# Allegro board QUADCOPTER1brd3_4.brd
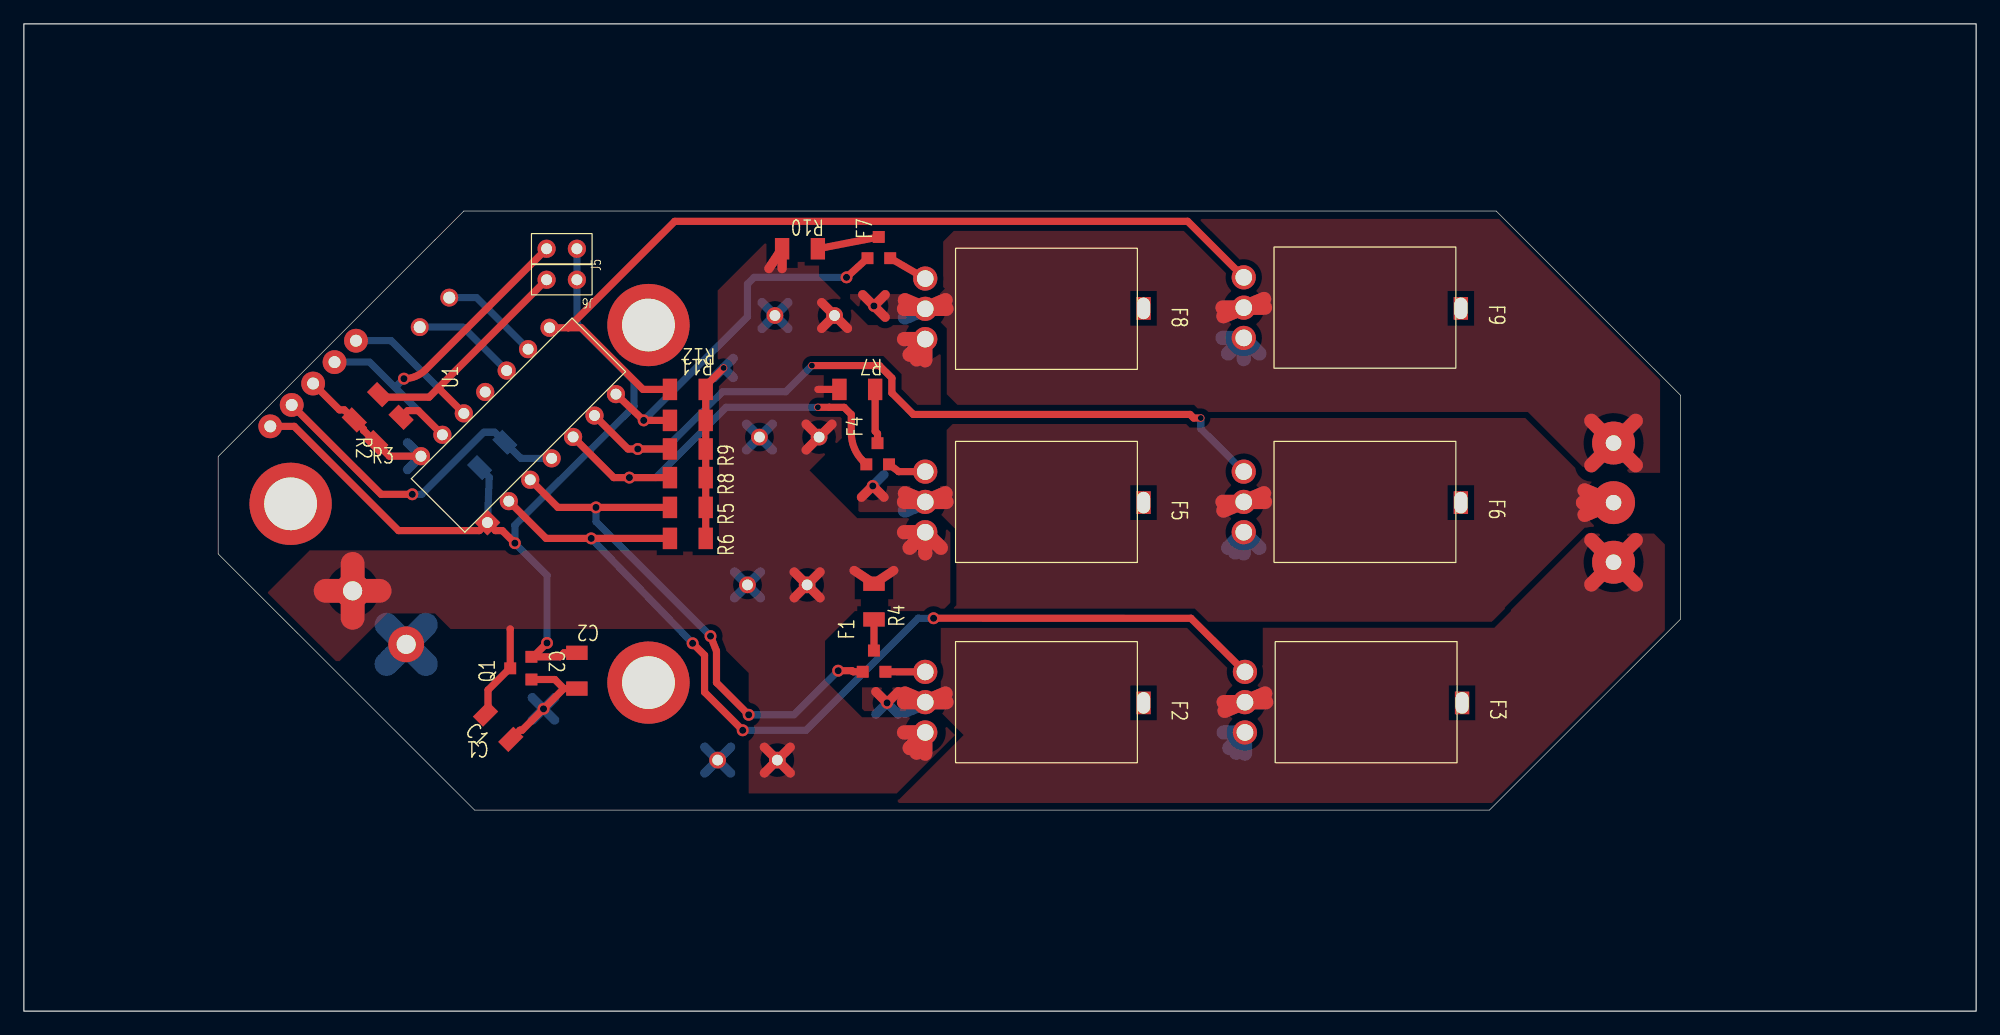
[diagram p0: board, top side]
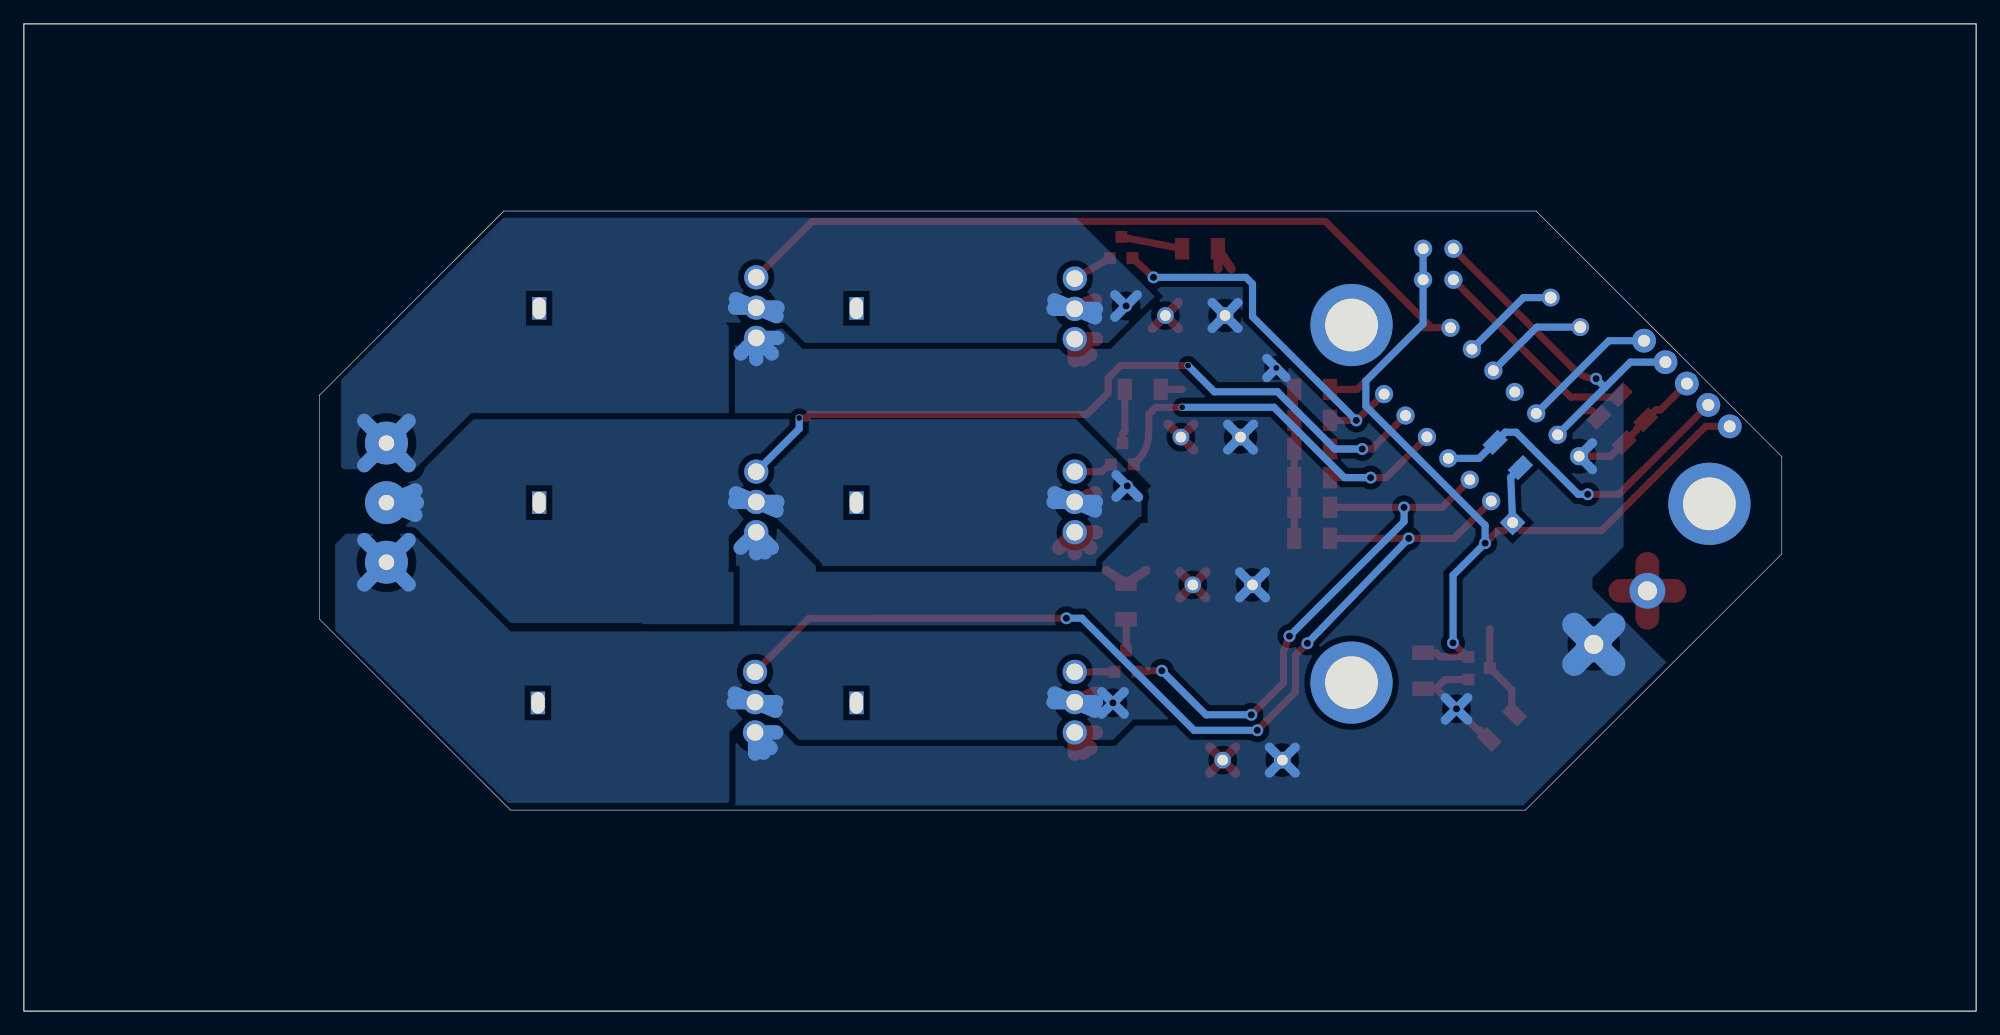
[diagram p1: board, bottom side, seen from below]

Outline 163.65 x 82.83 mm; copper layers: TOP, BOTTOM. Coordinates in mm from the lower left corner of the outline.
Outline path: rectangle 0,0 163.65,82.83 ; 16.29,46.53 16.29,38.36 37.78,16.87 122.86,16.87 138.86,32.88 138.86,51.68 123.42,67.13 36.89,67.13 16.29,46.53

## Placement (name value [footprint] x y rotation side)
C1  1uF  [SMD_CAP_1206]  39.76 23.86 315 top
C2  1uF  [SMD_CAP_1206]  46.36 28.56 270 top
C3  100uF  [CAP250]  66.16 24.06 180 top
C4  100uF  [CAP250]  68.66 38.76 180 top
C5  100uF  [CAP250]  70.96 61.36 180 top
C6  100uF  [CAP250]  69.66 51.16 180 top
F1  2N7002  [SOT23]  71.26 29.36 90 top
F2  IRF9Z34N  [TO220-3A]  75.56 28.46 180 top
F3  IRFZ34N  [TO220-3A]  102.36 28.46 180 top
F4  2N7002  [SOT23]  71.56 46.76 90 top
F5  IRF9Z34N  [TO220-3A]  75.56 45.26 180 top
F6  IRFZ34N  [TO220-3A]  102.26 45.26 180 top
F7  2N7002  [SOT23]  71.66 64.06 90 top
F8  IRF9Z34N  [TO220-3A]  75.56 61.46 180 top
F9  IRFZ34N  [TO220-3A]  102.26 61.56 180 top
J1  CON2  [KDCONN2]  27.56 35.26 315 top
J2  CON2  [KDCONN2_2]  35.66 59.86 225 top
J4  CON5  [CONN5]  18.86 49.06 315 top
J5  JUMPER  [JUMPER2]  46.36 63.96 180 top
J6  JUMPER  [JUMPER2]  46.36 61.36 180 top
J7  CON3  [ED1362]  135.76 35.16 90 top
NOREF  -  [unnamed]  52.36 27.56 0 top
NOREF#2  -  [unnamed#2]  124.56 19.46 180 top
NOREF#3  -  [unnamed]  52.36 57.56 0 top
NOREF#4  -  [unnamed]  22.36 42.56 0 top
NOREF#5  -  [unnamed#2]  97.86 36.26 180 top
NOREF#6  -  [unnamed#2]  97.86 19.46 180 top
NOREF#7  -  [unnamed#2]  97.86 52.56 180 top
NOREF#8  -  [unnamed#2]  124.46 36.26 180 top
NOREF#9  -  [unnamed#2]  124.46 52.56 180 top
Q1  Diodes_AP1117T50L-U  [SOT23]  41.66 28.76 180 top
R1  10k  [SMD_RES_1206]  39.26 46.66 225 bottom
R2  10k  [SMD_RES_1206]  28.76 50.66 45 top
R3  10k  [SMD_RES_1206]  30.56 48.76 45 top
R4  10k  [SMD_RES_1206]  71.26 34.36 90 top
R5  10k  [SMD_RES_1206]  55.66 42.26 180 top
R6  10k  [SMD_RES_1206]  55.66 39.66 180 top
R7  10k  [SMD_RES_1206]  69.86 52.16 180 top
R8  10k  [SMD_RES_1206]  55.66 44.76 180 top
R9  10k  [SMD_RES_1206]  55.66 47.16 180 top
R10  10k  [SMD_RES_1206]  65.06 63.96 180 top
R11  10k  [SMD_RES_1206]  55.66 49.56 180 top
R12  10k  [SMD_RES_1206]  55.66 52.16 180 top
U1  PIC16F1503  [PIC16FL1503]  41.46 49.16 135 top

## Library data of the parts
C1-C6 = CAP
F1 F4 F7 = 2N7002_1
F2 F5 F8 = IRF9Z34N_2
F3 F6 F9 = IRFZ34N
J1 J2 = CON2
J4 = CON5
J5 J6 = JUMPER: User Part Number: ***
J7 = CON3
Q1 = Diodes_AP1117T50L-U_1
R1-R12 = R
U1 = PIC16LF1503_4

## Footprints (pads in the part's own frame, mm; a bottom-side part is the same pattern mirrored in y, then rotated)
CAP250
  round 1.4 hole 0.9: 1(3,3) 2(8,3)
CONN5
  round 2 hole 1: 1(1.27,11.43) 2(1.27,8.89) 3(1.27,6.35) 4(1.27,3.81) 5(1.27,1.27)
ED1362
  round 3.6 hole 1.3: 1(2.5,2.5) 2(7.5,2.5) 3(12.5,2.5)
JUMPER2
  round 1.524 hole 0.914: 1(0,0) 2(2.54,0)
KDCONN2
  round 3 hole 1.6: 1(0,0) 2(6.35,0)
KDCONN2_2
  round 1.5 hole 1: 1(0,0) 2(3.5,0)
PIC16FL1503
  rect 1.524x1.524 hole 0.914: 1(-3.937,7.62)
  round 1.524 hole 0.914: 2(-3.937,5.08) 3(-3.937,2.54) 4(-3.937,0) 5(-3.937,-2.54) 6(-3.937,-5.08) 7(-3.937,-7.62) 8(3.937,-7.62) 9(3.937,-5.08) 10(3.937,-2.54) 11(3.937,0) 12(3.937,2.54) 13(3.937,5.08) 14(3.937,7.62)
SMD_CAP_1206
  rect 1.2x1.8 smd: 1(-1.5,0) 2(1.5,0)
SMD_RES_1206
  rect 1.2x1.8 smd: 1(-1.5,0) 2(1.5,0)
SOT23
  rect 1x1 smd: 1(-0.889,0.94) 2(-0.889,-0.965) 3(0.889,0)
TO220-3A
  round 2.032 hole 1.397: 1(0,0) 2(0,2.54) 3(0,5.08)
unnamed
  round 6.9 hole 4.42: (0,0)
unnamed#2
  rect 1.2x1.9 hole 1.1x1.8: (4,-6.4)

## Nets
12V: C1.1 C3.1 C4.1 C5.1 C6.1 F2.3(S) F5.3(S) F8.3(S) J1.1 Q1.3(VIN) R4.2 R7.2 R10.2
0: C1.2 C2.2 C3.2 C4.2 C5.2 C6.2 F3.3(S) F6.3(S) F9.3(S) J1.2 J4.3 Q1.1(GND) R2.1 R3.1 R5.1 R6.1 R8.1 R9.1 R11.1 R12.1 U1.14(VSS)
A: F2.2(D) F3.2(D) J7.1
ADDR0: J4.2 J5.2 R3.2 U1.13(ICSPDAT/ADDR0)
ADDR1: J4.1 J6.2 R2.2 U1.12(ICSPCLK/ADDR1)
AHIGH: F1.1(GATE) R5.2 U1.3(RA4)
ALOW: F3.1(G) R6.2 U1.2(RA5)
B: F5.2(D) F6.2(D) J7.2
BHIGH: F4.1(GATE) R8.2 U1.5(RC5)
BLOW: F6.1(G) R9.2 U1.6(RC4)
C: F8.2(D) F9.2(D) J7.3
CHIGH: F7.1(GATE) R11.2 U1.7(RC3)
CLOW: F9.1(G) R12.2 U1.8(RC2)
NMCLR: J4.4 R1.1 U1.4(NMCLR)
SCL: J2.2 U1.10(SCL)
SDA: J2.1 U1.9(SDA)
VEXT: C2.1 J4.5 J5.1 J6.1 Q1.2(VOUT) R1.2 U1.1(VDD)
N175255: F4.2(SOURCE) F5.1(G)
N175303: F4.3(DRAIN) R7.1
N175727: F7.2(SOURCE) F8.1(G)
N175775: F7.3(DRAIN) R10.1
N177443: F1.2(SOURCE) F2.1(G)
N1635110: F1.3(DRAIN) R4.1

Pads without a net: U1 11

## Via types
v1: diameter 1, hole 0.6, TOP to BOTTOM, 20 vias
v2: diameter 0.6, hole 0.5, TOP to BOTTOM, 4 vias

## Routing (per net, layer and track width the routed paths; a pad name or vN(x,y) marks a point on that pad's centre or on a via; arc(x,y) is an arc through that point)
12V: length 69.7
  TOP w0.6: C1.1 38.91,25.14 38.91,26.94 40.73,28.76 Q1.3 40.77,32.05 40.76,32.06 ; R7.2 66.56,52.16
  TOP w0.781: 64.58,36.85 C4.1 ; C4.1 66.74,34.68 ; C4.1 64.58,34.68 ; C4.1 66.74,36.85 ; 65.58,47.08 C6.1 ; C6.1 67.74,49.25 ; C6.1 65.58,49.25 ; C3.1 64.24,22.15 ; C3.1 62.08,19.98 ; C3.1 62.08,22.15 ; C3.1 64.24,19.98 ; 66.88,57.28 C5.1 ; C5.1 66.88,59.45 ; C5.1 69.04,57.28 ; 63.56,62.3 R10.2 62.45,62.3 ; 72.92,36.97 R4.2 69.6,36.97
  TOP w1.2: 73.78,56.38 F8.3 ; F8.3 74.84,54.68 ; F8.3 75.56,54.61 ; F8.3 74.25,55.08 ; 74.84,21.68 F2.3 ; F2.3 73.78,23.38 ; F2.3 75.56,21.61 ; F2.3 74.25,22.08 ; 73.78,40.18 F5.3 ; F5.3 75.56,38.41 ; F5.3 74.25,38.88 ; F5.3 76.87,38.88
  TOP w2: 27.56,33 J1.1 ; J1.1 25.3,35.26 ; J1.1 27.56,37.52 ; J1.1 29.82,35.26
0: length 104.4
  TOP w0.6: R6.1 R5.1 R8.1 R9.1 R11.1 R12.1 57.16,52.46 v2(58.66,53.96) ; U1.14 30.64,46.56 R3.1 28.47,48.73 28.47,48.83 R2.1 26.85,50.45 26.45,50.45 J4.3 ; 45.27,27.06 45.26,27.06 v1(43.56,25.36) 41.77,23.57 41.59,23.57 C1.2 ; 45.27,27.06 44.51,27.82 Q1.1 ; 45.27,27.06 C2.2
  BOTTOM w0.781: C6.2 62.74,47.08 ; C6.2 60.58,47.08 ; C6.2 62.74,49.25 ; C6.2 60.58,49.25 ; 42.62,26.3 v1(43.56,25.36) ; v1(43.56,25.36) 44.5,26.3 ; v1(43.56,25.36) 44.5,24.42 ; v1(43.56,25.36) 42.62,24.42 ; C4.2 61.74,34.68 ; C4.2 61.74,36.85 ; C4.2 59.58,36.85 ; C4.2 59.58,34.68 ; v2(58.66,53.96) 59.46,53.16 ; v2(58.66,53.96) 57.86,53.16 ; v2(58.66,53.96) 59.46,54.76 ; C5.2 64.04,57.28 ; C5.2 61.88,59.45 ; C5.2 61.88,57.28 ; C5.2 64.04,59.45 ; 57.08,19.98 C3.2 ; C3.2 59.24,22.15 ; C3.2 57.08,22.15 ; C3.2 59.24,19.98 ; 32.16,45.43 U1.14 32.16,47.69
  BOTTOM w1.2: 100.95,38.88 F6.3 ; F6.3 103.57,38.88 ; F6.3 101.54,38.48 ; F6.3 102.26,38.41 ; 100.49,56.48 F9.3 ; F9.3 102.26,54.71 ; F9.3 103.57,55.18 ; F9.3 100.95,55.18 ; 101.05,22.08 F3.3 ; F3.3 102.36,21.61 ; F3.3 100.59,23.38 ; F3.3 101.64,21.68
  BOTTOM w2: 30.4,32.42 J1.2 ; J1.2 33.7,32.42 ; J1.2 30.4,29.13 ; J1.2 33.7,29.13
A: length 58
  TOP w0.781: 73.3,26.8 v1(72.36,25.86) 71.42,26.8
  TOP w1.2: F3.2 104.06,26.64 ; F3.2 100.59,25.92 ; F3.2 100.66,25.2 ; F3.2 104.13,25.92 ; J7.1 135.12,35.8 ; J7.1 135.12,39.52 ; J7.1 131.4,39.52 ; J7.1 131.4,35.8 ; 73.78,25.92 F2.2 ; F2.2 77.34,25.92 ; F2.2 73.86,26.64 ; F2.2 77.26,26.64
  BOTTOM w0.781: v1(72.36,25.86) 73.3,24.92 ; v1(72.36,25.86) 71.42,26.8 ; v1(72.36,25.86) 73.3,26.8 ; v1(72.36,25.86) 71.42,24.92
  BOTTOM w1.2: 100.66,25.2 F3.2 ; F3.2 104.13,25.92 ; F3.2 104.06,26.64 ; F3.2 100.59,25.92 ; F2.2 77.34,25.92 ; F2.2 73.78,25.92 ; F2.2 77.26,26.64 ; F2.2 73.86,25.2 ; J7.1 135.12,39.52 ; J7.1 131.4,35.8 ; J7.1 135.12,35.8 ; J7.1 131.4,39.52
ADDR0: length 33.5
  TOP w0.6: R3.2 32.18,50.38 33.06,50.38 U1.13 ; J5.2 33.67,53.81 arc(32.84,53.26) v1(31.86,53.06)
  BOTTOM w0.6: J4.2 28.99,54.45 31.12,52.32 ; 31.12,52.32 v1(31.86,53.06) ; 31.12,52.32 U1.13
ADDR1: length 32.8
  TOP w0.6: R2.2 30.03,51.51 33.97,51.51 34.74,52.28 ; 34.74,52.28 J6.2 ; 34.74,52.28 U1.12
  BOTTOM w0.6: U1.12 30.78,56.25 J4.1
AHIGH: length 46.4
  TOP w0.6: F1.1 69.52,28.47 69.43,28.56 v1(68.26,28.56) ; U1.3 44.77,42.26 v1(47.96,42.26) R5.2 ; v1(60.76,24.86) 58.06,27.56 58.06,30.21 v1(57.56,31.46)
  BOTTOM w0.6: v1(68.26,28.56) 64.56,24.86 v1(60.76,24.86) ; v1(57.56,31.46) 47.96,41.06 v1(47.96,42.26)
ALOW: length 83.9
  TOP w0.6: F3.1 97.83,32.96 v1(76.26,32.96) ; v1(56.06,30.86) 57.06,29.86 57.06,26.76 v1(60.26,23.56) ; U1.2 43.78,39.66 v1(47.56,39.66) R6.2
  BOTTOM w0.6: v1(47.56,39.66) v1(56.06,30.86) ; v1(76.26,32.96) 74.96,32.96 65.56,23.56 v1(60.26,23.56)
B: length 51.3
  TOP w0.781: 70.22,43.12 v1(71.16,44.06) 72.1,43.12
  TOP w1.2: 100.56,42 F6.2 ; F6.2 103.96,43.44 ; F6.2 104.03,42.72 ; F6.2 100.49,42.72 ; 73.86,43.44 F5.2 ; F5.2 73.78,42.72 ; F5.2 77.34,42.72 ; F5.2 77.26,43.44 ; 130.84,43.68 J7.2 ; J7.2 130.84,41.64 ; J7.2 130.7,42.66
  BOTTOM w0.781: v1(71.16,44.06) 72.1,45 ; v1(71.16,44.06) 70.22,43.12 ; v1(71.16,44.06) 72.1,43.12
  BOTTOM w1.2: 130.84,43.68 J7.2 ; J7.2 130.84,41.64 ; J7.2 130.7,42.66 ; 100.49,42.72 F6.2 ; F6.2 100.56,42 ; F6.2 103.96,43.44 ; F6.2 104.03,42.72 ; 73.86,42 F5.2 ; F5.2 77.34,42.72 ; F5.2 77.26,43.44 ; F5.2 73.78,42.72
BHIGH: length 35.4
  TOP w0.6: R8.2 v1(50.76,44.76) 49.45,44.76 U1.5 ; v2(66.56,50.66) 67.5,50.66 67.51,50.66 68.76,50.66 69.36,50.06 69.36,48.52 arc(69.61,47.24) 70.34,46.16 F4.1
  BOTTOM w0.6: v1(50.76,44.76) 52.96,44.76 58.86,50.66 v2(66.56,50.66)
BLOW: length 66.1
  TOP w0.6: v2(66.06,54.16) 71.72,54.16 72.77,53.11 72.77,51.86 74.56,50.06 97.76,50.06 98.06,49.76 v2(98.66,49.76) ; R9.2 v1(51.46,47.16) 50.64,47.16 U1.6
  BOTTOM w0.6: v2(66.06,54.16) 63.86,51.96 58.56,51.96 53.76,47.16 v1(51.46,47.16) ; v2(98.66,49.76) 98.66,48.86 F6.1
C: length 58
  TOP w0.781: v1(71.26,59.16) 72.2,60.11 ; v1(71.26,59.16) 70.32,60.11 ; v1(71.26,59.16) 72.2,58.22
  TOP w1.2: 100.49,59.02 F9.2 ; F9.2 100.56,58.3 ; F9.2 103.96,59.74 ; F9.2 104.03,59.02 ; F8.2 77.26,59.64 ; F8.2 73.86,59.64 ; F8.2 73.78,58.92 ; F8.2 77.34,58.92 ; J7.3 135.12,49.52 ; J7.3 131.4,49.52 ; J7.3 131.4,45.8 ; J7.3 135.12,45.8
  BOTTOM w0.781: v1(71.26,59.16) 72.2,60.11 ; v1(71.26,59.16) 72.2,58.22 ; v1(71.26,59.16) 70.32,60.11
  BOTTOM w1.2: F9.2 104.03,59.02 ; F9.2 103.96,59.74 ; F9.2 100.49,59.02 ; F9.2 100.56,58.3 ; 131.4,45.8 J7.3 ; J7.3 135.12,45.8 ; J7.3 131.4,49.52 ; J7.3 135.12,49.52 ; F8.2 77.26,59.64 ; F8.2 73.78,58.92 ; F8.2 77.34,58.92 ; F8.2 73.86,58.2
CHIGH: length 31.4
  TOP w0.6: R11.2 v1(51.96,49.56) U1.7 ; F7.1 v1(68.96,61.56)
  BOTTOM w0.6: v1(68.96,61.56) 61.21,61.56 60.66,61.01 60.66,58.26 v1(51.96,49.56)
CLOW: length 74.5
  TOP w0.6: F9.1 97.56,66.26 54.56,66.26 45.63,57.34 ; 45.63,57.34 46.73,57.34 51.9,52.16 R12.2 ; 45.63,57.34 U1.8
NMCLR: length 28
  TOP w0.6: v1(32.56,43.36) 29.95,43.36 J4.4
  BOTTOM w0.6: v1(32.56,43.36) 33.36,43.36 38.57,48.57 39.47,48.57 R1.1 41.67,46.38 U1.4
SCL: length 8.8
  BOTTOM w0.6: J2.2 36.83,57.39 U1.10
SDA: length 8.4
  BOTTOM w0.6: J2.1 37.94,59.86 U1.9
VEXT: length 76
  TOP w0.6: 42.69,29.73 44.93,29.73 45.27,30.06 C2.1 ; 42.69,29.73 v1(43.85,30.89) ; 42.69,29.73 Q1.2 ; v1(41.16,39.26) 40.11,40.32 39.53,40.32 U1.1 38.18,40.32 31.41,40.32 22.66,49.06 J4.5
  BOTTOM w0.6: J5.1 J6.1 46.36,57.66 51.16,52.87 51.16,50.76 41.16,40.76 v1(41.16,39.26) 43.85,36.57 v1(43.85,30.89) ; R1.2 39.01,44.79 U1.1
N175255: length 3.2
  TOP w0.6: F4.2 73.33,45.27 73.34,45.26 F5.1
N175303: length 4.6
  TOP w0.6: R7.1 71.36,48.65 71.56,48.45 F4.3
N175727: length 3.4
  TOP w0.6: F7.2 F8.1
N175775: length 5.2
  TOP w0.6: 71.66,64.95 R10.1
N177443: length 3.3
  TOP w0.6: F2.1 F1.2
N1635110: length 2.6
  TOP w0.6: F1.3 R4.1

## Copper pours and planes (outline as drawn; the poured copper is in the pictures)
12V on TOP: 60.76,18.26 60.76,28.36 57.06,32.06 35.76,32.06 34.46,33.36 30.46,33.36 26.46,29.36 26.16,29.36 20.46,35.06 20.46,35.16 23.96,38.66 56.76,38.66 58.16,40.06 58.16,60.46 63.36,65.66 66.66,65.66 66.66,61.66 70.76,57.56 76.36,57.56 76.86,57.06 76.86,49.76 70.26,49.76 65.86,45.36 69.86,41.36 76.46,41.36 77.66,40.16 77.66,34.26 76.96,33.56 69.66,33.56 67.16,31.06 67.16,27.76 70.26,24.66 76.56,24.66 78.06,23.16 73.16,18.26 ; 3 cut-outs
0 on BOTTOM: 104.36,23.56 104.36,17.26 37.96,17.26 25.96,29.26 32.16,35.46 32.16,36.36 29.56,38.96 29.56,59.56 36.86,66.86 75.26,66.86 68.56,60.16 68.56,60.06 72.66,55.96 98.26,55.96 100.06,57.76 104.56,57.76 104.36,57.56 104.36,49.86 75.36,49.86 69.76,44.26 69.76,41.46 73.96,37.26 96.76,37.26 96.86,37.36 96.86,37.56 100.66,41.36 103.06,41.36 104.31,40.11 103.96,39.76 103.96,32.06 76.76,32.06 70.16,25.46 70.16,24.76 70.46,24.46 67.26,24.46 67.26,24.36 70.46,24.36 70.51,24.41 72.16,22.76 98.76,22.76 100.66,24.66 103.26,24.66 ; 10 cut-outs
A on TOP: 70.26,24.76 76.56,24.76 78.16,23.16 73.26,18.26 73.26,17.56 73.36,17.46 123.06,17.46 137.56,31.96 137.56,39.16 136.66,40.06 131.06,40.06 124.66,33.66 124.66,33.56 123.26,32.16 76.86,32.16 76.86,27.16 70.26,27.16 ; 1 cut-out
A on BOTTOM: 122.86,31.86 131.06,40.06 136.66,40.06 137.56,39.16 137.56,31.96 123.06,17.46 104.66,17.46 104.51,17.61 104.51,23.41 103.26,24.66 100.56,24.66 98.66,22.76 72.36,22.76 70.66,24.46 67.46,24.46 67.36,24.56 74.66,31.86
B on TOP: 69.96,41.46 76.46,41.46 78.01,39.91 77.96,39.86 77.96,33.66 78.06,33.56 84.36,33.56 85.26,32.66 123.36,32.66 130.96,40.26 134.26,40.26 134.66,40.66 134.66,44.36 133.96,45.06 132.16,45.06 132.16,45.16 130.46,45.16 125.86,49.76 78.36,49.76 77.36,48.76 77.36,44.16 77.26,44.06 69.96,44.06
B on BOTTOM: 69.96,41.46 69.96,43.96 69.86,44.06 75.46,49.66 125.96,49.66 130.46,45.16 134.26,45.16 134.46,44.96 134.46,40.56 134.26,40.36 130.86,40.36 130.76,40.46 123.06,32.76 123.06,32.56 111.86,32.56 111.76,32.46 104.16,32.46 104.16,36.86 104.56,36.86 104.66,36.96 104.56,37.06 104.56,39.86 102.96,41.46 100.66,41.46 96.76,37.56 96.76,37.36 73.76,37.36 73.76,37.86 70.16,41.46
C on TOP: 130.66,45.26 130.46,45.26 125.76,49.96 84.06,49.96 83.61,50.41 78.71,50.41 77.16,51.96 77.16,56.86 76.36,57.66 70.86,57.66 69.26,59.26 69.26,60.16 76.16,60.16 76.26,60.06 76.66,60.06 77.21,60.61 77.06,60.76 77.06,64.56 78.26,65.76 82.06,65.76 82.21,65.61 83.06,66.46 123.66,66.46 137.16,52.96 137.16,45.16 130.76,45.16
C on BOTTOM: 98.16,56.06 99.86,57.76 104.86,57.76 104.56,57.46 104.56,49.86 112.16,49.86 112.46,50.16 112.46,50.06 125.56,50.06 125.76,50.26 130.56,45.46 136.86,45.46 137.06,45.66 137.06,52.96 123.46,66.56 75.46,66.56 68.86,59.96 72.76,56.06
